# Altium PCB IM_v1.0.PcbDoc (part 4 of 4)
Units mm, origin at the board's own origin, x right, y up, seen from the top; angles counter-clockwise.
Board outline 120 x 85 mm, 6 copper layers (Top Layer, S1, S2, S3, S4, Bottom Layer), stack 1.546 mm thick; 285 components, 245 nets, 1048 pads, 483 vias.
Unrouted connection lines stored in the file: 53.
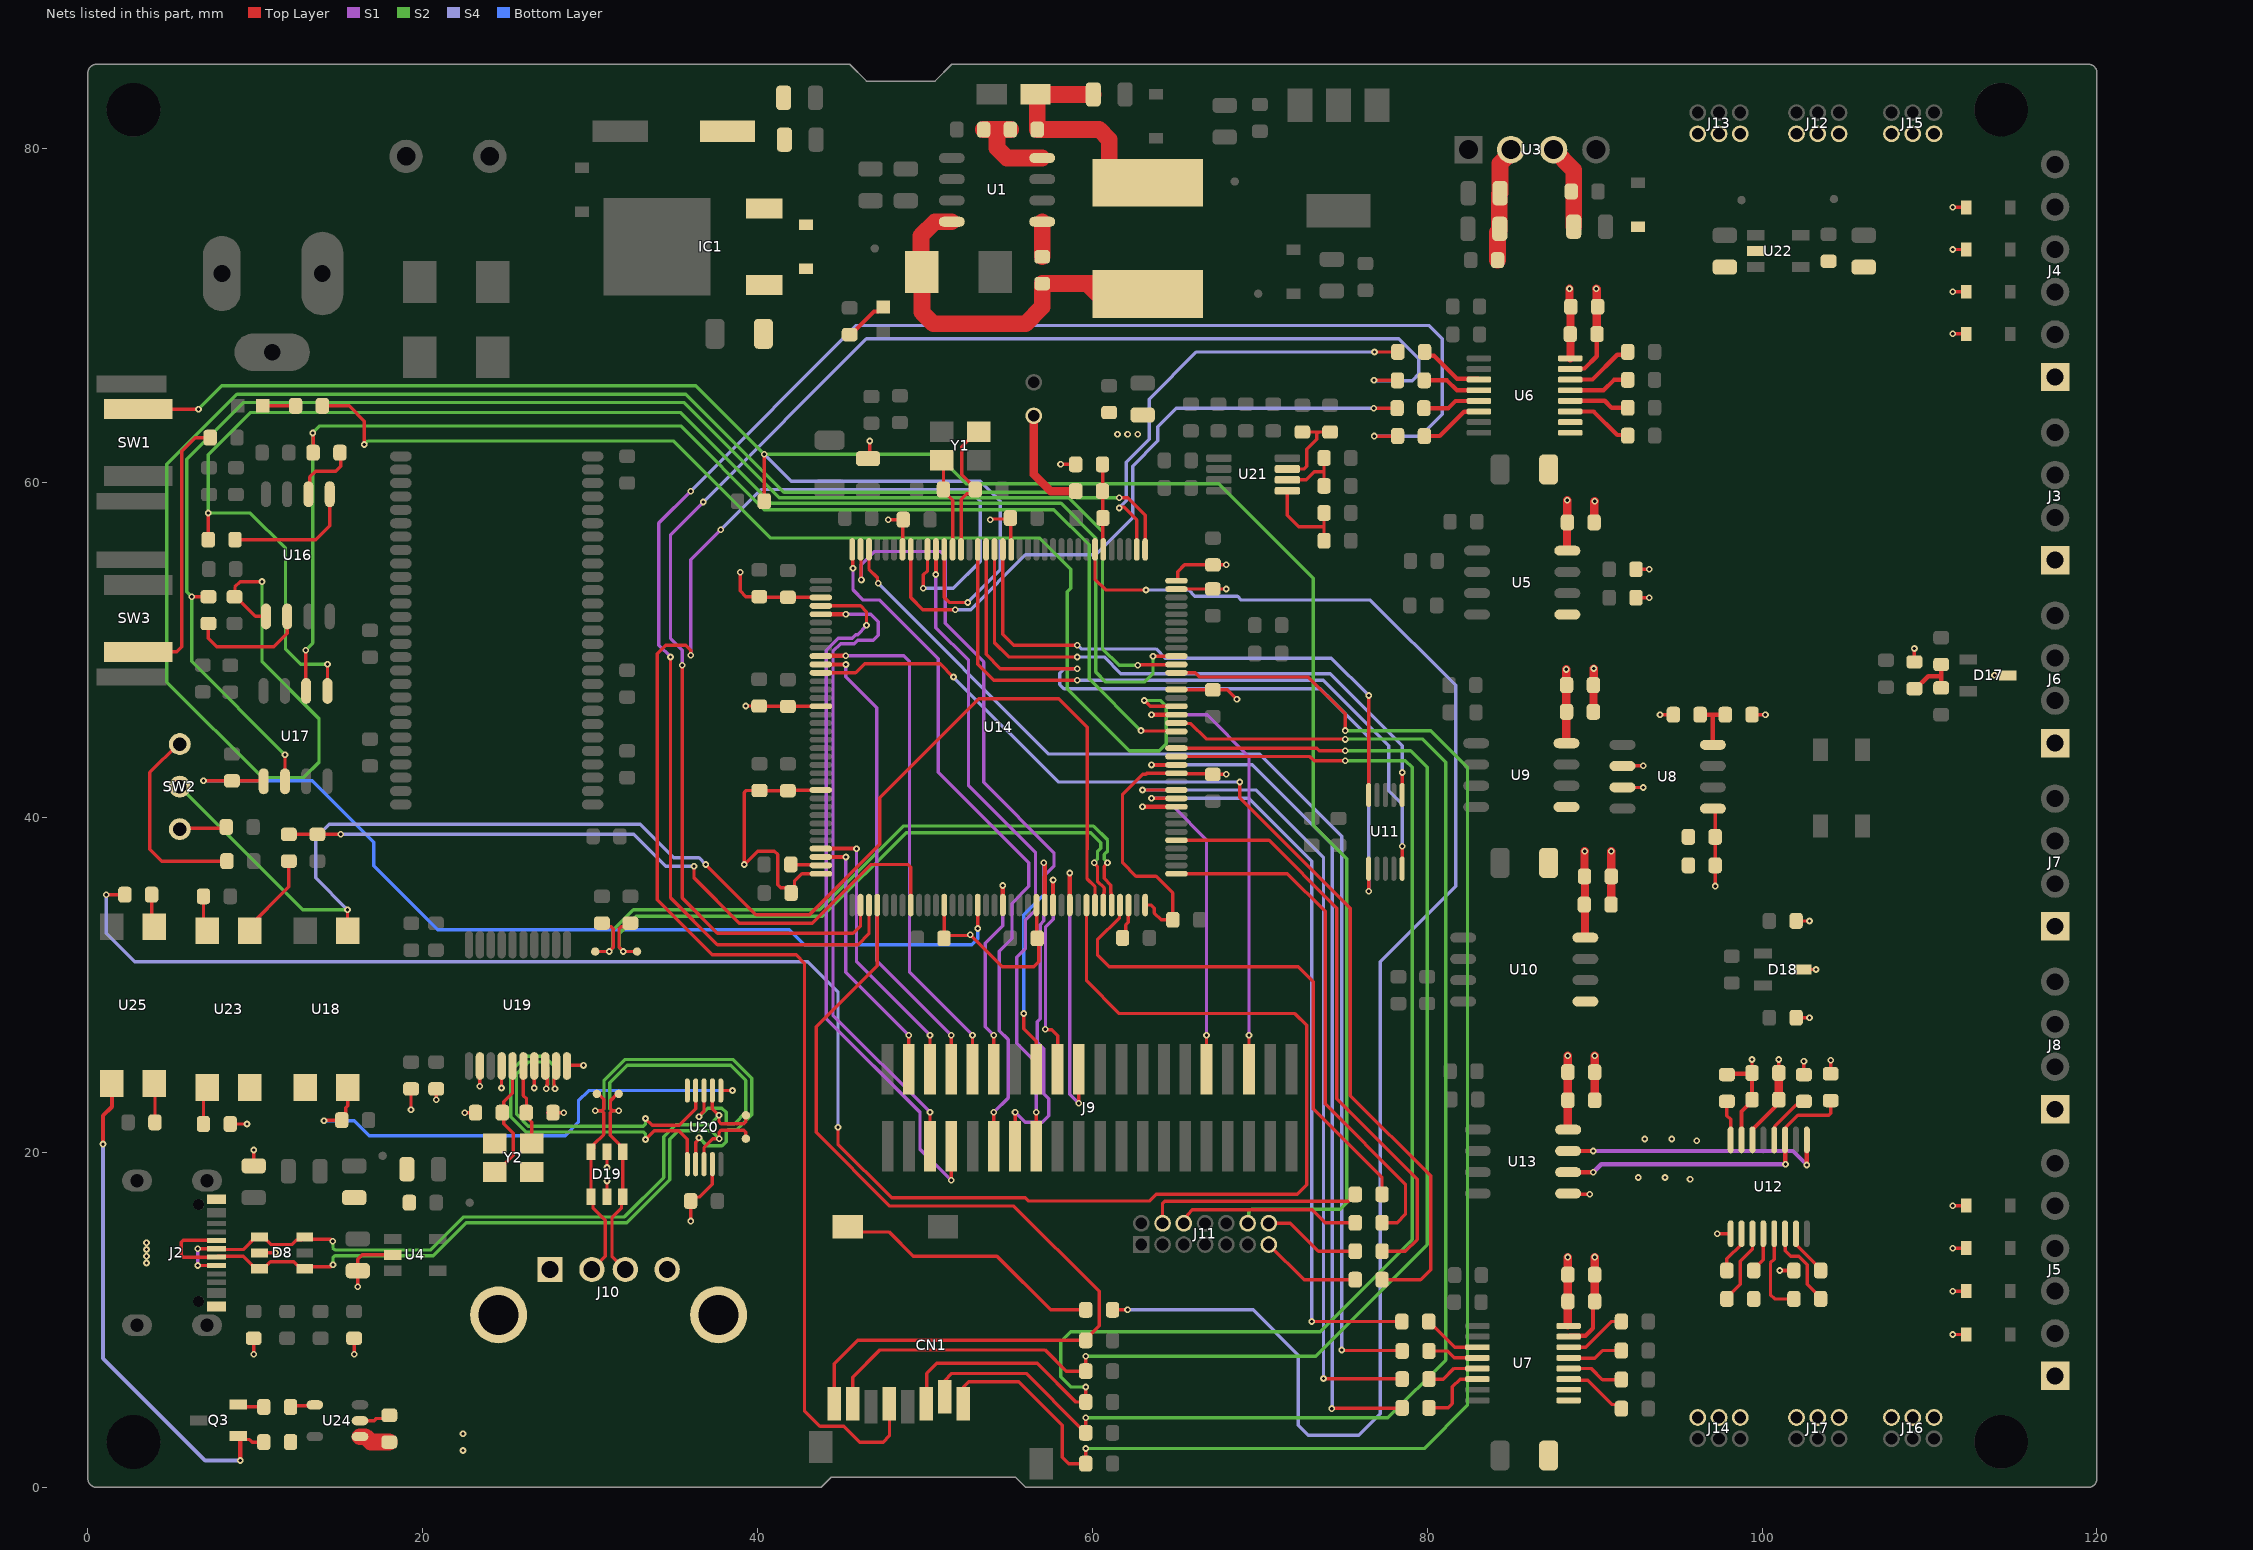
[diagram p7: the nets of this part, all layers, seen from the top]

## Via types
v1: diameter 0.4, hole 0.2, Top Layer to Bottom Layer, tented both sides, 474 vias
v2: diameter 0.4, hole 0.2, Top Layer to Bottom Layer, 8 vias
v3: diameter 0.45, hole 0.3, Top Layer to Bottom Layer, tented both sides, 1 vias

## Nets (pads, with @x,y where several pads share a name; then routed paths per layer and width w, separated by ;. In a path a pad name is that pad's centre, name@x,y a point inside that pad or via, vN(x,y) a via of type N, cw(c..) or ccw(c..) an arc to the next point about the centre after c; other vN are vias at no path point) (continued)
LTDC_G3: J9.21 U14.99 | length 17.9
  Top Layer w0.2: v1(59.19,22.932) J9.21@59.19,24.965
  Top Layer w0.254: v1(58.641,36.696) 58.645,36.691 58.645,34.785 U14.99@58.65,34.78
  S1 w0.2: v1(58.641,36.696) 58.641,23.481 v1(59.19,22.932)
LTDC_G4: J9.35 U14.69 | length 17.1
  Top Layer w0.2: J9.35@50.3,24.965 v1(50.3,26.998)
  Top Layer w0.254: U14.69@43.78,38.15 v1(45.91,38.15)
  S1 w0.2: v1(45.91,38.15) 45.91,31.389 v1(50.3,26.998)
LTDC_G5: J9.37 U14.70 | length 15.7
  Top Layer w0.2: J9.37@49.03,24.965 v1(49.03,26.998)
  Top Layer w0.254: U14.70@43.78,37.65 v1(45.275,37.65)
  S1 w0.2: v1(45.275,37.65) 45.275,30.753 v1(49.03,26.998)
LTDC_G6: J9.23 U14.97 | length 13.5
  Top Layer w0.2: v1(57.187,27.365) 57.225,27.326 57.574,27.326 57.92,26.98 J9.23@57.92,24.965
  Top Layer w0.254: U14.97@57.65,34.78 v1@57.65,36.275
  S1 w0.2: v1(57.187,27.365) 57.2,27.377 57.2,33.475 57.65,33.925 v1(57.65,36.275)
LTDC_G7: J9.9 U14.117 | length 20.4
  Top Layer w0.2: J9.9@66.81,24.965 v1(66.81,26.998)
  Top Layer w0.254: v1@62.987,40.65 U14.117@65.02,40.65
  S1 w0.2: v1(62.987,40.647) 64.853,40.647 66.81,38.69 v1(66.81,26.998)
LTDC_HSYNC: J9.25 U14.96 | length 15.7
  Top Layer w0.2: v1(55.9,28.3) 55.9,27.396 56.523,26.773 56.527,26.773 56.65,26.65 J9.25@56.65,24.965
  Top Layer w0.254: v1(57.1,37.3) 57.1,37.26 57.15,37.21 U14.96@57.15,34.78
  Bottom Layer w0.2: v1(55.9,28.3) 55.9,34.2 57.1,35.4 v1(57.1,37.3)
LTDC_R0: J9.5 U14.128 | length 27
  Top Layer w0.2: J9.5@69.35,24.965 v1(69.35,26.998)
  Top Layer w0.254: v1(63.525,46.15) U14.128@65.02,46.15
  S1 w0.2: v1(63.525,46.15) 66.85,46.15 69.35,43.65 v1(69.35,26.998)
LTDC_R1: J9.30 U14.36 | length 41.9
  Top Layer w0.2: U14.36@45.65,56.02 45.675,55.995 45.675,54.925 v1(45.7,54.9) ; J9.30@54.11,20.365 v1(54.11,22.398)
  S1 w0.2: v1(45.7,54.9) 45.702,54.898 45.702,53.598 46.3,53 47.3,53 50.8,49.5 50.8,42.7 56.2,37.3 56.2,35.9 55.2,34.9 55.2,32.8 54.432,32.032 54.432,27.28 54.965,26.747 54.965,23.253 v1(54.11,22.398)
LTDC_R2: J9.28 U14.35 | length 49.5
  Top Layer w0.2: U14.35@46.15,56.02 46.175,55.995 46.175,54.225 v1(46.2,54.2) ; J9.28@55.38,20.365 v1(55.38,22.398)
  S1 w0.2: v1(46.2,54.2) 46.2,55.1 47,55.9 50.9,55.9 51.2,55.6 51.2,51.6 53.5,49.3 53.5,42.1 57.7,37.9 57.7,37.1 57.1,36.5 57.1,33.838 56.873,33.611 56.873,27.977 56.7,27.804 56.7,26.596 57.1,26.196 57.1,23.5 57.4,23.2 57.4,22.2 57,21.8 55.978,21.8 v1(55.38,22.398)
LTDC_R3: J9.31 U14.46 | length 31.4
  Top Layer w0.2: J9.31@52.84,24.965 v1(52.84,26.998)
  Top Layer w0.254: U14.46@43.78,49.65 43.793,49.663 45.255,49.663 v1(45.268,49.677)
  S1 w0.2: v1(45.268,49.677) 45.282,49.662 48.738,49.662 48.9,49.5 49.077,49.323 49.077,48.5 49.077,42 49.077,30.761 v1(52.84,26.998)
LTDC_R4: J9.36 U14.41 | length 39.5
  Top Layer w0.2: J9.36@50.3,20.365 v1(50.3,22.398)
  Top Layer w0.254: U14.41@43.78,52.15 v1(45.275,52.15)
  S1 w0.2: v1(45.275,52.15) 46.75,52.15 47.2,51.7 47.2,50.9 46.9,50.6 45.99,50.6 45.786,50.396 44.958,50.396 44.5,49.938 44.5,28.198 v1(50.3,22.398)
LTDC_R5: J9.26 U14.26 | length 39.1
  Top Layer w0.2: J9.26@56.65,20.365 v1(56.65,22.398)
  Top Layer w0.254: v1(50.65,54.525) U14.26@50.65,56.02
  S1 w0.2: v1(50.65,54.525) 50.65,51.35 52.6,49.4 52.6,41.9 56.6,37.9 56.6,34.5 55.978,33.878 55.978,32.178 55.473,31.673 55.473,26.527 56.65,25.35 v1(56.65,22.398)
LTDC_R6: J9.33 U14.47 | length 28.3
  Top Layer w0.2: J9.33@51.57,24.965 v1(51.57,26.998)
  Top Layer w0.254: U14.47@43.78,49.15 v1(45.275,49.15)
  S1 w0.2: v1(45.275,49.15) 45.275,48.425 47.127,46.573 47.127,42.8 47.127,36.8 47.127,31.441 v1(51.57,26.998)
LTDC_R7: J9.29 U14.91 | length 12.8
  Top Layer w0.2: J9.29@54.11,24.965 v1(54.11,26.998)
  Top Layer w0.254: U14.91@54.65,34.78 v1(54.65,35.946)
  S1 w0.2: v1(54.11,26.998) 53.6,27.508 53.6,32.5 54.65,33.55 v1(54.65,35.946)
LTDC_VSYNC: J9.34 U14.40 | length 43.5
  Top Layer w0.2: U14.40@43.78,52.65 46.15,52.65 46.5,52.3 v1(46.5,51.5) ; v1(51.57,18.332) J9.34@51.57,20.365
  S1 w0.2: v1(46.5,51.5) 46.5,51.449 45.978,50.927 45.854,50.927 45.65,50.723 44.823,50.723 44.101,50.001 44.101,27.999 49.7,22.4 49.7,20.202 v1(51.57,18.332)
NetBT1_1: BT1.1 R46.2 | length 6.4
  Top Layer w0.5: BT1.1@56.5,64 56.5,60.5 57.5,59.5 R46.2@59,59.5
NetC1_1: C1.1 D2.1 L1.1 U1.8 | length 22.6
  Top Layer w1: D2.1@49.764,72.651 49.764,74.764 50.595,75.595 U1.8@51.6,75.595 ; D2.1@49.815,72.6 49.815,70.185 50.5,69.5 56,69.5 57,70.5 C1.1@57,71.9 L1.1@62.675,71.9 ; 59.675,71.9 L1.1@60.3,71.275
NetC1_2: C1.2 U1.1 | length 2.1
  Top Layer w1: C1.2@57,73.5 U1.1@57,75.595
NetC4_2: C4.2 C5.2 D1.2 FB1.1 IC1.S
NetC6_1: C6.1 FB2.1 L1.2 R2.2 | length 11.7
  Top Layer w1: C6.1@56.61,83.2 FB2.1@60.05,83.2 ; C6.1@56.7,83.11 R2.2@56.7,81.1 60.414,81.1 61,80.514 L1.2@61,78.85
NetC14_2: C14.2 C15.2 R77.1 U3.2 | length 6.9
  Top Layer w1: R77.1@84.2,73.3 84.2,74.975 84.3,75.075 84.3,77.25 C14.2@84.35,77.3 84.35,79.074 85,79.724 U3.2@85,79.9
NetC39_2: C39.2 R33.2 R34.2 | length 3.3
  Top Layer w0.254: C39.2@109.1,47.7 109.175,47.7 109.925,48.45 110.7,48.45 ; R33.2@110.7,47.75 110.7,48.45 ; R34.2@110.7,49.15 110.7,48.45
NetC49_1: C49.1 U12.2 | length 2.6
  Top Layer w0.2: C49.1@97.9,12.95 97.9,13.65 98.775,14.525 U12.2@98.775,15.15
NetC49_2: C49.2 U12.4 | length 2.4
  Top Layer w0.2: C49.2@99.5,12.95 99.5,13.025 100.075,13.6 U12.4@100.075,15.15
NetC53_1: C53.1 U12.5 | length 5.2
  Top Layer w0.2: U12.5@100.725,15.15 100.725,13.625 100.5,13.4 100.5,11.5 100.75,11.25 C53.1@101.9,11.25
NetC53_2: C53.2 U12.6 | length 5.1
  Top Layer w0.2: U12.6@101.375,15.15 101.375,14.125 101.7,13.8 102.2,13.8 102.7,13.3 102.7,12.125 103.5,11.325 C53.2@103.5,11.25
NetC54_1: C54.1 U12.3 | length 4.5
  Top Layer w0.2: C54.1@97.9,11.25 97.9,11.325 98.7,12.125 98.7,13.5 99.425,14.225 U12.3@99.425,15.15
NetC55_1: C55.1 U12.7 | length 2.8
  Top Layer w0.2: U12.7@102.025,15.15 102.025,14.512 103.5,13.037 C55.1@103.5,12.95
NetC56_1: C56.1 U14.23 Y1.3 | length 8.3
  Top Layer w0.2: U14.23@52.15,56.02 52.171,56.041 52.171,59.031 52.479,59.339 52.738,59.339 C56.1@53,59.6 53,59.675 52.2,60.474 52.2,62.15 53.1,63.05 Y1.3@53.2,63.05
NetC57_1: C57.1 U14.24 Y1.1 | length 5.6
  Top Layer w0.2: Y1.1@51,61.35 51.1,61.25 C57.1@51.1,59.6 51.1,59.518 51.65,58.968 U14.24@51.65,56.02
NetC58_1: C58.1 U14.71 | length 1.8
  Top Layer w0.2: C58.1@41.984,37.204 42.011,37.177 43.753,37.177 U14.71@43.78,37.15
NetC59_1: C59.1 U14.106 | length 2.1
  Top Layer w0.2: C59.1@61.799,32.815 61.987,33.003 61.987,33.59 62.15,33.753 U14.106@62.15,34.78
NetC92_2: C92.2 U19.5 Y2.1 | length 7.4
  Top Layer w0.2: Y2.1@24.3,18.825 24.4,18.825 25.4,19.825 25.4,21.144 24.827,21.717 24.827,22.298 C92.2@24.75,22.375 24.833,22.458 24.833,23.033 25.362,23.562 U19.5@25.362,25.165
NetC93_2: C93.2 U19.6 Y2.3 | length 4.5
  Top Layer w0.2: U19.6@26.012,25.165 26,25.153 26,23.4 26.2,23.2 26.2,22.1 26.5,21.8 Y2.3@26.5,20.85
NetCN1_9: CN1.9 R76.2 | length 16.1
  Top Layer w0.2: CN1.9@45.384,15.252 47.848,15.252 49.3,13.8 54.3,13.8 57.5,10.6 R76.2@59.6,10.6
NetD1_1: D1.1 IC1.G R3.2
NetD5_1: D5.1 R1.1 | length 2.7
  Top Layer w0.254: R1.1@45.5,68.851 45.575,68.851 46.951,70.227 47.227,70.227 D5.1@47.5,70.5
NetD22_1: D22.1 R5.1 | length 1.9
  Top Layer w0.2: D22.1@10.45,64.6 R5.1@12.4,64.6
NetJ11_4: J11.4 R62.2 | length 12.9
  Top Layer w0.2: J11.4@64.19,15.77 64.19,16.978 64.307,17.095 75.283,17.095 75.313,17.125 75.346,17.125 75.7,17.479 R62.2@75.7,17.5
NetJ11_6: J11.6 R63.2 | length 11.1
  Top Layer w0.2: J11.6@65.46,15.77 65.46,15.986 65.681,16.207 65.681,16.281 65.971,16.571 73.129,16.571 73.9,15.8 R63.2@75.7,15.8
NetJ11_13: J11.13 R64.1 | length 6
  Top Layer w0.2: J11.13@70.54,14.5 72.64,12.4 R64.1@75.7,12.4
NetJ11_14: J11.14 R68.2 | length 5.9
  Top Layer w0.2: J11.14@70.54,15.77 71.83,15.77 73.5,14.1 R68.2@75.7,14.1
NetQ3_2: Q3.2 R91.1 | length 1.6
  Top Layer w0.2: Q3.2@8.985,4.95 9.135,4.8 R91.1@10.5,4.8
NetR2_1: R2.1 R4.2 U1.4 | length 5.7
  Top Layer w1: R4.2@53.5,81.1 R2.1@55.1,81.1 ; 54.3,81.1 54.3,79.991 54.886,79.405 U1.4@57,79.405
NetR16_1: R16.1 U6.3 | length 3.9
  Top Layer w0.254: R16.1@79.843,67.818 80.068,67.593 80.407,67.593 81.785,66.215 83.037,66.215 U6.3@83.088,66.165
NetR17_2: R17.2 U6.14 | length 4.1
  Top Layer w0.254: U6.14@88.536,66.165 89.865,66.165 91.354,67.654 91.814,67.654 R17.2@91.978,67.818
NetR18_1: R18.1 U6.4 | length 3.5
  Top Layer w0.254: R18.1@79.82,66.121 81.179,66.121 81.77,65.53 U6.4@83.088,65.53
NetR19_2: R19.2 U6.13 | length 3.7
  Top Layer w0.254: U6.13@88.536,65.53 90.53,65.53 91.152,66.152 R19.2@91.976,66.152
NetR20_1: R20.1 U6.5 | length 3.5
  Top Layer w0.254: R20.1@79.797,64.46 81.26,64.46 81.695,64.895 U6.5@83.088,64.895
NetR21_2: R21.2 U6.12 | length 3.6
  Top Layer w0.254: U6.12@88.536,64.895 88.542,64.9 90.6,64.9 91.015,64.485 R21.2@91.978,64.485
NetR22_1: R22.1 U6.6 | length 3.9
  Top Layer w0.254: R22.1@79.826,62.795 80.751,62.795 82.208,64.253 83.081,64.253 U6.6@83.088,64.26
NetR23_2: R23.2 U6.11 | length 4
  Top Layer w0.254: U6.11@88.536,64.26 89.94,64.26 91.346,62.854 91.943,62.854 R23.2@91.978,62.818
NetR24_1: R24.1 U7.3 | length 3.6
  Top Layer w0.2: R24.1@80.094,9.909 80.094,9.87 80.439,9.525 80.478,9.525 81.638,8.365 U7.3@83,8.365
NetR25_2: R25.2 U7.14 | length 3.8
  Top Layer w0.2: U7.14@88.448,8.365 89.465,8.365 91,9.9 R25.2@91.6,9.9
NetR26_1: R26.1 U7.4 | length 3.1
  Top Layer w0.2: R26.1@80.102,8.143 81.199,8.143 81.612,7.73 U7.4@83,7.73
NetR27_2: R27.2 U7.13 | length 3.4
  Top Layer w0.2: U7.13@88.448,7.73 88.478,7.7 90,7.7 90.467,8.167 R27.2@91.6,8.167
NetR28_1: R28.1 U7.5 | length 3.2
  Top Layer w0.2: R28.1@80.102,6.461 80.961,6.461 81.595,7.095 U7.5@83,7.095
NetR29_2: R29.2 U7.12 | length 3.4
  Top Layer w0.2: U7.12@88.448,7.095 89.805,7.095 90.467,6.433 R29.2@91.6,6.433
NetR30_1: R30.1 U7.6 | length 4.2
  Top Layer w0.2: R30.1@80.102,4.745 81.245,4.745 81.5,5 81.5,6 81.96,6.46 U7.6@83,6.46
NetR31_2: R31.2 U7.11 | length 3.9
  Top Layer w0.2: U7.11@88.448,6.46 88.508,6.4 89.6,6.4 91.059,4.941 91.359,4.941 R31.2@91.6,4.7
NetR35_2: R35.2 R36.1 U8.8 | length 3.3
  Top Layer w0.254: R36.1@96.3,46.15 97.05,46.15 ; U8.8@97.062,44.349 97.05,44.361 97.05,46.15 ; R35.2@97.8,46.15 97.05,46.15
NetR40_2: R40.2 U12.12 | length 3.2
  Top Layer w0.2: U12.12@100.725,20.75 100.754,20.779 100.754,21.554 102.012,22.812 102.262,22.812 R40.2@102.5,23.05
NetR41_2: R41.2 U12.16 | length 2.4
  Top Layer w0.2: R41.2@97.9,23.05 97.9,22.2 98.125,21.975 U12.16@98.125,20.75
NetR52_2: R52.2 U16.2 | length 7.2
  Top Layer w0.2: R52.2@7.195,51.596 7.195,50.705 7.7,50.2 11.1,50.2 11.902,51.002 U16.2@11.902,52.02
NetR53_1: R53.1 U16.6 | length 4
  Top Layer w0.2: U16.6@13.172,59.32 13.248,59.397 13.248,60.348 13.6,60.7 14.8,60.7 15.1,61 15.1,61.75 R53.1@15.05,61.8
NetR54_1: R54.1 U16.5 | length 7.9
  Top Layer w0.2: R54.1@8.785,56.602 13.602,56.602 14.442,57.442 U16.5@14.442,59.32
NetR56_2: R56.2 SW2.2 | length 2.8
  Top Layer w0.2: SW2.2@5.486,39.313 5.549,39.376 8.199,39.376 R56.2@8.262,39.439
NetR58_1: R58.1 SW2.3 | length 12
  Top Layer w0.2: SW2.3@5.486,44.393 5.393,44.393 3.7,42.7 3.7,38.1 4.4,37.4 R58.1@8.3,37.4
NetR59_2: R59.2 R65.2 U21.7 | length 5.2
  Top Layer w0.2: U21.7@71.645,60.825 72.625,60.825 72.8,61 72.8,62 73.4,62.6 73.4,62.918 73.517,63.035 ; R65.2@72.537,63.035 73.517,63.035 ; R59.2@74.197,63.035 73.517,63.035
NetR60_2: R60.2 R66.1 U21.6 | length 4
  Top Layer w0.2: U21.6@71.645,60.175 72.775,60.175 73.252,60.652 73.835,60.652 ; R60.2@73.835,59.822 73.835,60.652 ; R66.1@73.835,61.481 73.835,60.652
NetR61_2: R61.2 R67.1 U21.5 | length 5.6
  Top Layer w0.2: U21.5@71.645,59.525 71.645,58.055 72.33,57.37 73.835,57.37 ; R67.1@73.835,56.541 73.835,57.37 ; R61.2@73.835,58.2 73.835,57.37
NetR85_1: R85.1 SW3.2 | length 16.5
  Top Layer w0.2: SW3.2@3,49.9 5.3,49.9 5.6,50.2 5.6,61.9 6.4,62.7 R85.1@7.3,62.7
NetR86_2: R86.2 U23.1 | length 2.2
  Top Layer w0.2: R86.2@6.9,21.7 U23.1@6.9,23.853
NetR87_2: R87.2 U23.4 | length 2.1
  Top Layer w0.2: R87.2@6.9,35.3 6.9,33.273 U23.4@6.93,33.243
NetR88_1: R88.1 U23.3 | length 5.2
  Top Layer w0.2: U23.3@9.47,33.243 9.47,33.343 12,35.873 R88.1@12,37.4
NetR91_2: R91.2 U24.4 | length 1.5
  Top Layer w0.2: R91.2@12.1,4.8 12.162,4.862 13.488,4.862 U24.4@13.55,4.925
NetR92_2: R92.2 U25.4 | length 2.3
  Top Layer w0.2: U25.4@3.97,24.12 4,24.09 R92.2@4,21.8
NetR93_2: R93.2 U25.1 | length 2
  Top Layer w0.2: R93.2@3.8,35.4 3.8,33.65 U25.1@3.97,33.48
NRST: J11.12 R47.2 SW1.1 U14.25 | length 149.8
  Top Layer w0.2: SW1.1@3,64.4 v1(6.6,64.4) ; R47.2@40.4,58.9 v1@40.4,61.7 ; U14.25@51.15,56.02 51.15,53.15 51.446,52.854 v1(52.55,52.854)
  S2 w0.2: v1(6.6,64.4) 8,65.8 36.3,65.8 v1(40.4,61.7) 50.7,61.7 52.45,59.95 67.55,59.95 73.2,54.3 73.2,39.55 75.2,37.55 75.2,17 74.8,16.6 69.5,16.6 69.336,16.436 69.336,15.836 J11.12@69.27,15.77
  S4 w0.2: v1(40.4,61.7) 42,60.1 53.3,60.1 54.5,58.9 54.5,54.804 v1(52.55,52.854)
RS232_RX: U12.9 U13.7 | length 16.1
  Top Layer w0.254: U13.7@88.418,20.09 v1(89.913,20.09) ; v1(102.675,19.255) U12.9@102.675,20.75
  S1 w0.254: v1(89.913,20.09) 101.839,20.09 v1(102.675,19.255)
RS232_TX: R42.1 U12.11 U13.6 | length 19.2
  Top Layer w0.2: U12.11@101.375,20.75 101.375,21.416 101.45,21.491 101.45,21.522 102.146,22.217 103.983,22.217 104.1,22.334 R42.1@104.1,23.1
  Top Layer w0.254: U13.6@88.418,18.82 v1(89.913,18.82) ; U12.11@101.375,20.75 101.387,20.737 101.387,19.313 v1(101.4,19.3)
  S1 w0.254: v1(89.913,18.82) 90.393,19.3 v1(101.4,19.3)
SDMMC2_CK: CN1.5 U14.27 | length 97.2
  Top Layer w0.2: v1(36,49.7) 36,50 35.7,50.3 34.5,50.3 34,49.8 34,35.1 37.3,31.8 42.3,31.8 42.8,31.3 42.8,4.57 43.723,3.647 45.153,3.647 46.1,2.7 47.5,2.7 47.874,3.074 CN1.5@47.874,4.702 ; v1(49.9,53.7) 49.9,54.5 50.15,54.75 U14.27@50.15,56.02
  S1 w0.2: v1(36,49.7) 36,55.4 v1(37.8,57.2)
  S4 w0.2: v1(37.8,57.2) 40.2,59.6 52.6,59.6 53.3,58.9 53.3,55.3 51.7,53.7 v1(49.9,53.7)
SDMMC2_CMD: CN1.3 R71.2 U14.123 | length 83.6
  Top Layer w0.2: CN1.3@50.074,4.702 50.1,4.728 50.1,6.8 50.7,7.4 56.7,7.4 59.006,5.094 R71.2@59.6,5.094 v1(59.6,5.994) ; U14.123@65.02,43.65 72.996,43.65 73.246,43.4 v1(75.1,43.4)
  S2 w0.2: v1(59.6,5.994) 58.706,5.994 58.1,6.6 58.1,8.7 58.7,9.3 73.6,9.3 79.1,14.8 79.1,43 78.7,43.4 v1(75.1,43.4)
SDMMC2_D0: CN1.7 R70.2 U14.124 | length 85
  Top Layer w0.2: CN1.7@45.674,4.702 45.674,6.574 47.3,8.2 57.171,8.2 58.437,6.934 R70.2@59.6,6.934 v1(59.6,7.834) ; U14.124@65.02,44.15 73.396,44.15 73.546,44 v1(75.1,44)
  S2 w0.2: v1(59.6,7.834) 73.334,7.834 80,14.5 80,43 79,44 v1(75.1,44)
SDMMC2_D1: CN1.8 R69.2 U14.76 | length 57.5
  Top Layer w0.2: CN1.8@44.574,4.702 44.574,7.374 45.974,8.774 R69.2@59.6,8.774 59.6,8.849 60.4,9.649 60.4,11.7 55.3,16.8 47.9,16.8 43.5,21.2 43.5,27.5 47.15,31.15 U14.76@47.15,34.78
SDMMC2_D2: CN1.1 R73.2 U14.133 | length 95
  Top Layer w0.2: CN1.1@52.274,4.702 52.3,4.728 52.3,6 52.6,6.3 55.6,6.3 58.2,3.7 58.2,1.8 58.586,1.414 R73.2@59.6,1.414 v1(59.6,2.314) ; U14.133@65.02,48.65 66.15,48.65 66.4,48.4 72.9,48.4 75.1,46.2 v1(75.1,45.2)
  S2 w0.2: v1(59.6,2.314) 79.814,2.314 82.4,4.9 82.4,43 80.2,45.2 v1(75.1,45.2)
SDMMC2_D3: CN1.2 R72.2 U14.127 | length 88
  Top Layer w0.2: CN1.2@51.174,5.102 51.174,6.374 51.6,6.8 56.054,6.8 59.287,3.567 59.308,3.567 59.6,3.275 R72.2@59.6,3.254 v1(59.6,4.154) ; U14.127@65.02,45.65 65.049,45.621 65.879,45.621 66.8,44.7 75.073,44.7 v1(75.1,44.673)
  S2 w0.2: v1(59.6,4.154) 77.654,4.154 81.1,7.6 81.1,43.3 79.7,44.7 75.127,44.7 v1(75.1,44.673)
SDMMC_Det: R76.1 U14.7 | length 93.4
  Top Layer w0.2: U14.7@60.15,56.02 60.15,54.25 60.798,53.602 v1(63.198,53.602) ; R76.1@61.2,10.6 v1(62.1,10.6)
  S4 w0.2: v1(62.1,10.6) 69.6,10.6 72.3,7.9 72.3,3.7 72.9,3.1 75.9,3.1 77.2,4.4 77.2,31.4 81.7,35.9 81.7,47.9 76.6,53 68.9,53 68.666,53.234 66.116,53.234 65.75,53.6 v1@63.2,53.6
SGN_GND: C7.1 C12.1 C13.1 C16.1 C22.1 C25.1 C27.1 C28.1 C30.1 C32.1 C33.2 C35.1 C38.1 C39.1 C40.1 C42.1 C46.1 C47.1 C50.1 C52.1 C54.2 C55.2 C100.1 D7.1 D9.1 D10.1 D11.1 D12.1 D13.1 D14.1 D15.1 D16.1 D17.3 D18.3 J3.1 J4.1 J5.1 J6.1 J7.1 J8.1 R36.2 R37.1 R42.2 R82.1 R83.1 R84.1 U3.3 U5.5 U6.9 U6.10 U6.15 U7.9 U7.10 U7.15 U8.2 U9.5 U10.5 U12.1 U12.14 U13.5 U22.2 | length 46.6
  Top Layer w0.2: U13.5@88.9,17.5 v1(89.7,17.5) ; U8.2@92.1,43.1 v1(92.9,43.1) ; v1(93.9,46.15) R36.2@94.7,46.15 ; v1(97.325,15.15) U12.1@98.125,15.15 ; C46.1@101,24.75 v1(101,25.55) ; R37.1@102.032,28.047 v1(102.832,28.047) ; D18.3@102.423,30.925 v1(103.223,30.925) ; R42.2@104.1,24.7 v1(104.1,25.5) ; C39.1@109.1,49.3 v1(109.1,50.1) ; v1(111.388,9.123) D13.1@112.187,9.123 ; v1(111.388,11.715) D14.1@112.188,11.715 ; v1(111.388,14.287) D15.1@112.188,14.287 ; v1(111.388,16.825) D16.1@112.188,16.825 ; v1(111.388,68.9) D9.1@112.187,68.9 ; v1(111.388,71.413) D10.1@112.188,71.413 ; v1(111.388,73.939) D11.1@112.188,73.939 ; v1(111.388,76.453) D12.1@112.188,76.453 ; v1(113.885,48.5) D17.3@114.685,48.5
  Top Layer w0.254: U7.15@88.448,9 88.499,9.051 89.451,9.051 89.9,9.5 89.9,11 C28.1@90,11.1 ; U6.15@88.536,66.8 88.569,66.832 89.391,66.832 90.12,67.562 C25.1@90.12,68.901 ; U12.14@99.425,20.75 99.425,21.375 100.772,22.722 100.772,22.922 C47.1@101,23.15 ; v1(101.05,12.95) C55.2@101.9,12.95
  Top Layer w0.5: C35.1@89.921,46.32 89.929,46.328 89.929,48.137 89.937,48.145 v1@89.937,48.911 ; C22.1@89.969,57.634 89.977,57.642 89.977,58.877 v1(90,58.9) ; C28.1@90,11.1 C30.1@90,12.7 v1(90,13.75) ; C50.1@90,23.121 v1(90,25.771) ; v1(90.1,71.6) 90.12,71.58 C25.1@90.12,68.901 ; C40.1@90.979,34.808 90.987,34.816 90.987,36.487 C42.1@90.995,36.495 90.995,37.995 v1(91,38) ; C47.1@101,23.15 C46.1@101,24.75 ; v1@89.937,48.911 v1(89.938,48.912)
  Top Layer w1: U3.3@87.54,79.9 88.75,78.69 C12.1@88.75,75.3
  other v1: 95.7,18.4 92.6,18.5 94.2,18.5 96.1,20.7 93,20.8 94.6,20.8
SPI1_MISO: R52.1 U14.134 U17.2 | length 93.9
  Top Layer w0.2: v1(6.2,53.2) 6.202,53.198 7.193,53.198 R52.1@7.195,53.196 ; U17.2@11.765,42.17 v1(11.765,43.765) ; v1(62.7,49.1) 62.725,49.125 65.095,49.125 U14.134@65.117,49.147
  S2 w0.2: v1(11.765,43.765) 6.2,49.33 v1(6.2,53.2) 5.9,53.5 5.9,61.4 9.3,64.8 35.6,64.8 41.3,59.1 58.6,59.1 60.6,57.1 60.6,50.1 61.6,49.1 v1(62.7,49.1)
SPI1_MOSI: R54.2 U14.135 U17.5 | length 92.6
  Top Layer w0.2: R54.2@7.185,56.602 v1(7.185,58.197) ; U17.5@14.305,47.57 v1(14.305,49.165) ; v1(63.622,49.647) U14.135@65.117,49.647
  S2 w0.2: v1(14.305,49.165) 12.7,49.165 11.8,50.065 11.8,56.1 9.703,58.197 v1(7.185,58.197) 7.185,61.685 9.7,64.2 35.4,64.2 40.827,58.773 58.127,58.773 60.2,56.7 60.2,48.7 60.8,48.1 63.1,48.1 63.622,48.622 v1(63.622,49.647)
SPI1_NOR_CS: R51.2 U14.1 U16.1 | length 107.1
  Top Layer w0.2: v1(10.4,54.1) 9.1,54.1 8.779,53.779 8.779,53.221 R51.2@8.755,53.196 8.83,53.196 10.006,52.02 U16.1@10.632,52.02 ; v1(61.6,59.1) 62.1,59.1 63.147,58.053 U14.1@63.147,55.923
  S2 w0.2: v1(10.4,54.1) 10.4,49.3 13.8,45.9 13.8,43.3 12.9,42.4 10.4,42.4 4.7,48.1 4.7,61.1 8.9,65.3 35.7,65.3 41.573,59.427 58.735,59.427 59.062,59.1 v1(61.6,59.1)
SPI1_PSRAM_CS: R55.2 U14.88 U17.1 | length 57
  Top Layer w0.2: v1(6.905,42.2) 10.465,42.2 U17.1@10.495,42.17 ; v1(53.153,33.382) U14.88@53.153,34.877
  Bottom Layer w0.2: v1(6.905,42.2) 13.4,42.2 17.073,38.527 17.073,37.127 20.887,33.313 41.887,33.313 42.8,32.4 52.8,32.4 53.153,32.753 v1(53.153,33.382)
SPI1_SCK: R53.2 U14.126 U17.6 | length 80.9
  Top Layer w0.2: v1(13,50) 13.017,49.983 13.017,47.588 U17.6@13.035,47.57 ; v1(13.431,62.978) 13.45,62.959 R53.2@13.45,61.8 ; v1(62.9,45.2) 62.925,45.175 65.089,45.175 U14.126@65.117,45.147
  S2 w0.2: v1(13,50) 13.431,50.431 v1(13.431,62.978) 13.848,63.395 35.405,63.395 40.4,58.4 57.7,58.4 59.8,56.3 59.8,48.3 v1(62.9,45.2)
SPI2_CS: R16.2 U14.2 | length 26.6
  Top Layer w0.2: v1(61.6,58.5) 61.745,58.56 61.867,58.56 62.647,57.78 U14.2@62.647,55.923 ; v1(76.845,67.815) R16.2@78.34,67.815
  S4 w0.2: v1(61.6,58.5) 61.604,58.5 62.027,58.923 62.027,61.227 63.4,62.6 63.4,65 66.215,67.815 v1(76.845,67.815)
SPI2_MISO: R22.2 U14.75 | length 100.3
  Top Layer w0.2: v1(34.8,49.6) 34.8,35.2 37.6,32.4 46,32.4 46.65,33.05 U14.75@46.65,34.78 ; v1(76.828,62.792) R22.2@78.323,62.792
  S1 w0.2: v1(34.8,49.6) 34.1,50.3 34.1,57.6 v1(36,59.5)
  S4 w0.2: v1(36,59.5) 45.9,69.4 80.1,69.4 80.9,68.6 80.9,64.1 79.592,62.792 v1(76.828,62.792)
SPI2_MOSI: R20.2 U14.29 | length 39.6
  Top Layer w0.2: U14.29@49.15,56.02 49.15,53.15 49.873,52.427 v1(51.81,52.427) ; v1(76.799,64.457) R20.2@78.294,64.457
  S4 w0.2: v1(51.81,52.427) 52.727,52.427 56,55.7 60.2,55.7 62.4,57.9 62.4,61 63.9,62.5 63.9,63.357 65,64.457 v1(76.799,64.457)
SPI2_SCK: R18.2 U14.74 | length 90.2
  Top Layer w0.2: v1(35.5,49.1) 35.5,35.2 37.6,33.1 45.7,33.1 46.15,33.55 U14.74@46.15,34.78 ; v1(76.822,66.118) R18.2@78.317,66.118
  S1 w0.2: v1(35.5,49.1) 35.5,50 34.8,50.7 34.8,56.9 v1(36.75,58.85)
  S4 w0.2: v1(36.75,58.85) 46.5,68.6 78.3,68.6 79.5,67.4 79.5,66.5 79.1,66.1 76.84,66.1 v1(76.822,66.118)
STATUS_LED: R5.2 U14.129 | length 70.3
  Top Layer w0.2: R5.2@14,64.6 15.6,64.6 16.511,63.689 v1(16.511,62.286) ; v1(63.1,47) 63.45,46.65 U14.129@65.02,46.65
  S2 w0.2: v1(16.511,62.286) 16.725,62.5 34.971,62.5 40.771,56.7 56.85,56.7 58.7,54.85 58.7,53.7 58.5,53.5 58.5,47.7 62.2,44 64,44 64.4,44.4 64.4,46.65 64.05,47 v1(63.1,47)
SWCLK: R63.1 U14.109 | length 31.5
  Top Layer w0.2: U14.109@65.02,36.65 71.65,36.65 73.9,34.4 73.9,22.9 78.7,18.1 78.7,16.3 78.2,15.8 R63.1@77.3,15.8
SWDIO: R62.1 U14.105 | length 31.5
  Top Layer w0.2: U14.105@61.65,34.78 61.621,34.751 61.621,34.021 60.3,32.7 60.3,31.8 61,31.1 72.3,31.1 73.2,30.2 73.2,22.6 77.3,18.5 R62.1@77.3,17.5
U5_VCC: C22.2 J12.1 J12.2 J12.3 R13.2 R15.1 U5.8 | length 4.3
  Top Layer w0.2: R15.1@92.469,53.134 v1(93.269,53.134) ; R13.2@92.469,54.834 v1(93.269,54.834)
  Top Layer w0.5: 88.351,56.289 88.351,57.634 88.37,57.654 v1(88.37,58.962)
U6_VCC: C25.2 C27.2 J13.1 J13.2 J13.3 U6.16 | length 4.2
  Top Layer w0.5: v1(88.5,71.6) 88.5,70.596 C27.2@88.578,70.518 88.557,70.497 88.557,67.456 U6.16@88.536,67.435
U7_VCC: C28.2 C30.2 J14.1 J14.2 J14.3 U7.16 | length 4.1
  Top Layer w0.5: U7.16@88.4,9.683 C30.2@88.4,12.7 v1(88.4,13.75)
U9_VCC: C32.2 C33.1 C35.2 C38.2 J15.1 J15.2 J15.3 R35.1 U8.3 U8.5 U9.8 | length 11.1
  Top Layer w0.2: U8.3@91.662,41.8 v1(92.9,41.8) ; U8.5@97.062,40.539 97.2,40.401 C32.2@97.2,37.15 v1(97.2,35.912) ; R35.1@99.4,46.15 v1(100.2,46.15)
  Top Layer w0.5: U9.8@88.303,44.444 v1(88.303,48.855)
U10_VCC: C40.2 C42.2 J16.1 J16.2 J16.3 R39.2 U10.8 | length 6
  Top Layer w0.2: R39.2@102.032,33.829 v1(102.832,33.829)
  Top Layer w0.5: v1(89.4,38) 89.395,37.995 C42.2@89.395,36.495 89.42,36.47 89.42,32.855 U10.8@89.445,32.83
U13_VCC: C46.2 C47.2 C50.2 C52.2 J17.1 J17.2 J17.3 R40.1 R41.1 U12.15 U13.8 | length 11.5
  Top Layer w0.2: C46.2@99.4,24.75 v1(99.4,25.55) ; R40.1@102.5,24.65 v1(102.5,25.45)
  Top Layer w0.254: R41.1@97.9,24.65 97.95,24.7 99.35,24.7 C46.2@99.4,24.75 C47.2@99.4,23.15 99.4,23.075 98.775,22.45 U12.15@98.775,20.75
  Top Layer w0.5: 88.4,21.704 v1(88.4,25.771)
UART5_RX: R64.2 U14.48 | length 65.2
  Top Layer w0.2: U14.48@43.78,48.65 45.85,48.65 46.4,49.2 50.9,49.2 v1(51.7,48.4) ; v1(68.8,42.133) 68.8,41.2 75.4,34.6 75.4,23.4 80.2,18.6 80.2,13 79.6,12.4 R64.2@77.3,12.4
  S4 w0.2: v1(51.7,48.4) 57.967,42.133 v1(68.8,42.133)
UART5_TX: R68.1 U14.113 | length 35.4
  Top Layer w0.2: U14.113@65.02,38.65 70.55,38.65 74.6,34.6 74.6,23.2 79.4,18.4 79.4,14.8 78.7,14.1 R68.1@77.3,14.1
UART7_RX: U11.10 U14.18 | length 34.4
  Top Layer w0.2: U14.18@54.65,56.02 54.65,50.95 55.3,50.3 v1(59.1,50.3) ; U11.10@76.5,41.35 v1(76.5,47.3)
  S4 w0.2: v1(59.1,50.3) 59.326,50.074 63.799,50.074 64.346,49.527 74.273,49.527 v1(76.5,47.3)
UART7_RX_SEL: U11.1 U14.20 | length 44.2
  Top Layer w0.2: U14.20@53.65,56.02 53.65,49.75 54.5,48.9 v1(59.1,48.9) ; v1(76.5,35.6) U11.1@76.5,36.95
  S4 w0.2: v1(59.1,48.9) 58.32,48.9 58.05,48.63 58.05,47.95 58.3,47.7 73.6,47.7 76.5,44.8 v1(76.5,35.6)
UART7_TX: U11.6 U14.19 | length 35.4
  Top Layer w0.2: U14.19@54.15,56.02 54.15,50.45 55,49.6 v1(59.1,49.6) ; U11.6@78.5,41.35 v1(78.5,42.7)
  S4 w0.2: v1(59.1,49.6) 60.7,49.6 61.7,48.6 74.2,48.6 78.5,44.3 v1(78.5,42.7)
UART7_TX_SEL: U11.5 U14.21 | length 41.1
  Top Layer w0.2: U14.21@53.15,56.02 53.15,49.15 54.1,48.2 v1(59.1,48.2) ; U11.5@78.5,36.95 v1(78.5,38.3)
  S4 w0.2: v1(59.1,48.2) 73.8,48.2 77.7,44.3 77.7,41.6 78.5,40.8 v1(78.5,38.3)
USART2_CTS: R26.2 U14.34 | length 70.5
  Top Layer w0.2: U14.34@46.65,56.02 46.65,54.85 47.162,54.338 47.162,54.038 v1(47.2,54) ; v1(74.9,8.2) 74.928,8.172 78.474,8.172 R26.2@78.502,8.143
  S4 w0.2: v1(47.2,54) 57.4,43.8 70,43.8 74.9,38.9 v1(74.9,8.2)
USART2_RTS: R24.2 U14.118 | length 45.5
  Top Layer w0.2: v1(63.525,41.15) U14.118@65.02,41.15 ; v1(73.1,9.9) R24.2@78.485,9.9
  S4 w0.2: v1(63.525,41.15) 69.35,41.15 73.1,37.4 v1(73.1,9.9)
USART2_RX: R30.2 U14.122 | length 52.2
  Top Layer w0.2: v1(74.3,4.7) 74.322,4.722 78.48,4.722 R30.2@78.502,4.745
  Top Layer w0.23: v1(63.525,43.15) U14.122@65.02,43.15
  S4 w0.2: v1(63.525,43.15) 69.55,43.15 74.327,38.373 74.327,4.727 v1(74.3,4.7)
USART2_TX: R28.2 U14.119 | length 50.4
  Top Layer w0.2: v1(62.987,41.65) U14.119@65.02,41.65 ; v1(73.8,6.5) 73.819,6.481 78.483,6.481 R28.2@78.502,6.461
  S4 w0.2: v1(62.987,41.65) 69.796,41.65 73.8,37.646 v1(73.8,6.5)
USB_D1_N: D8.3 D8.4 J2.A7 J2.B7 TP8.1 U20.8 | length 45.7
  Top Layer w0.2: J2.B7@7.686,14.75 5.693,14.75 5.576,14.633 5.576,13.867 5.693,13.75 J2.A7@7.686,13.75 7.736,13.8 9.275,13.8 10.025,13.05 D8.3@10.25,13.05 10.475,13.05 10.9,13.475 12.3,13.475 12.725,13.05 D8.4@12.95,13.05 13.076,13.176 14.515,13.176 v1(14.64,13.301) ; U20.8@36.8,19.3 36.8,20.3 37.323,20.823 v2(37.701,20.823) 37.695,20.828 37.695,21.204 37.813,21.321 39.183,21.321 39.3,21.204 TP8.1@39.3,20.823
  S2 w0.2: v1(14.64,13.301) 14.635,13.307 14.635,13.708 14.752,13.826 20.619,13.826 22.594,15.8 32.194,15.8 34.749,18.355 34.749,20.799 35.25,21.3 37.223,21.3 v2(37.701,20.823)
USB_D1_P: D8.1 D8.6 J2.A6 J2.B6 TP7.1 U20.2 | length 43.4
  Top Layer w0.2: v1(6.55,13.25) J2.B6@7.686,13.25 ; v1(6.55,14.25) J2.A6@7.686,14.25 7.736,14.2 9.275,14.2 10.025,14.95 D8.1@10.25,14.95 10.475,14.95 10.922,14.503 12.203,14.503 12.475,14.775 12.775,14.775 D8.6@12.95,14.95 13.076,14.824 14.504,14.824 v1(14.63,14.698) ; U20.2@37.3,23.7 37.3,22.61 v2(37.69,22.22) 37.695,22.214 37.695,21.838 37.813,21.721 39.183,21.721 39.3,21.838 TP7.1@39.3,22.22
  S1 w0.2: v1(6.55,13.25) v1(6.55,14.25)
  S2 w0.2: v1(14.63,14.698) 14.635,14.693 14.635,14.292 14.752,14.174 20.475,14.174 22.449,16.149 32.049,16.149 34.4,18.5 34.4,20.944 35.105,21.649 37.151,21.649 37.69,22.188 v2(37.69,22.22)
USB_D2_N: D19.1 D19.6 J10.02 TP9.1 U20.7 | length 32.6
  Top Layer w0.2: J10.02@30.1,13.01 30.9,13.81 30.9,15.944 30.172,16.672 30.172,17.228 D19.1@30.05,17.35 D19.6@30.05,20.05 30.225,20.225 30.225,20.497 30.8,21.072 30.8,21.343 30.8,22.383 30.683,22.5 ; v2(30.302,22.5) 30.683,22.5 ; TP9.1@30.4,23.5 30.481,23.5 30.813,23.168 30.813,22.617 30.696,22.5 30.683,22.5 ; U20.7@36.3,19.3 36.3,20.619 36.5,20.819 v2(36.5,20.873)
  S2 w0.2: v2(30.302,22.5) 30.708,22.5 30.826,22.617 30.826,24.319 32.055,25.549 38.545,25.549 39.649,24.445 39.649,22.255 38.742,21.348 38.245,21.348 38.128,21.231 38.128,20.646 37.877,20.396 36.977,20.396 v2(36.5,20.873)
USB_D2_P: D19.3 D19.4 J10.03 TP10.1 U20.3 | length 30.8
  Top Layer w0.2: v2(31.699,22.5) 31.317,22.5 ; TP10.1@31.7,23.5 31.619,23.5 31.213,23.094 31.213,22.604 31.317,22.5 ; J10.03@32.1,13.01 31.3,13.81 31.3,16.1 31.867,16.667 31.867,17.267 D19.3@31.95,17.35 D19.4@31.95,20.05 31.95,20.275 31.2,21.025 31.2,22.383 31.317,22.5 ; v2(36.5,22.127) 36.5,22.181 36.8,22.481 U20.3@36.8,23.7
  S2 w0.2: v2(31.699,22.5) 31.292,22.5 31.175,22.617 31.175,24.175 32.2,25.2 38.4,25.2 39.3,24.3 39.3,22.4 38.597,21.697 38.234,21.697 38.117,21.814 38.117,22.396 37.867,22.647 37.02,22.647 v2(36.5,22.127)
USB_D_N: U19.9 U20.6 | length 22
  Top Layer w0.2: v1(27.9,23.8) 27.862,23.838 27.862,23.98 27.837,24.005 27.837,24.383 27.962,24.509 U19.9@27.962,25.165 ; v2(33.3,20.773) 33.827,21.3 35.3,21.3 35.8,20.8 U20.6@35.8,19.3
  S2 w0.2: v1(27.9,23.8) 27.862,23.838 27.862,24.018 27.811,24.069 27.811,25.183 27.245,25.749 26.155,25.749 25.251,24.845 25.251,22.13 26.155,21.226 33.183,21.226 33.3,21.108 v2(33.3,20.773)
USB_D_P: U19.8 U20.4 | length 20.5
  Top Layer w0.2: U19.8@27.312,25.165 27.312,24.509 27.437,24.384 27.437,24.005 27.411,23.98 27.411,23.838 v1(27.373,23.8) ; v2(33.3,22.027) 33.7,21.627 35.327,21.627 36.3,22.6 U20.4@36.3,23.7
  S2 w0.2: v1(27.373,23.8) 27.411,23.838 27.411,24.018 27.462,24.069 27.462,25.038 27.1,25.4 26.3,25.4 25.6,24.7 25.6,22.275 26.3,21.574 33.183,21.574 33.3,21.692 v2(33.3,22.027)
USB_FS_ID: SW2.1 U14.102 U18.1 | length 86.6
  Top Layer w0.2: v1(15.5,34.5) 15.5,33.257 U18.1@15.514,33.243 ; v1(36.9,37.2) 39.9,34.2 43.1,34.2 47.3,38.4 47.3,41.2 53.2,47.1 58,47.1 59.7,45.4 59.7,38.1 59.673,38.073 59.673,36.365 60.15,35.888 U14.102@60.15,34.78
  S2 w0.2: SW2.1@5.486,41.853 12.839,34.5 v1(15.5,34.5)
  S4 w0.2: v1(15.5,34.5) 13.6,36.4 13.6,38.8 14.4,39.6 33,39.6 35,37.6 36.5,37.6 v1(36.9,37.2)
USB_FS_N: R94.1 TP11.1 U14.103 | length 39.9
  Top Layer w0.2: R94.1@32.4,33.7 32.176,33.476 31.842,33.476 31.724,33.359 31.724,32.245 v1(31.969,32) TP11.1@32.8,32 ; v1(60.1,37.3) 60.1,37.283 60.3,37.083 60.3,36.2 60.7,35.8 60.7,35.502 60.679,35.48 60.679,34.809 U14.103@60.65,34.78
  S2 w0.2: v1(31.969,32) 31.75,32.219 31.75,33.1 32.75,34.1 43.866,34.1 48.866,39.1 59.9,39.1 60.5,38.5 60.5,38.166 60.3,37.966 60.3,37.517 60.1,37.317 v1(60.1,37.3)
USB_FS_P: R95.1 TP12.1 U14.104 | length 41.3
  Top Layer w0.2: TP12.1@30.3,32 v1(31.131,32) 31.375,32.245 31.375,33.359 31.258,33.476 30.924,33.476 R95.1@30.7,33.7 ; v1(60.9,37.3) 60.9,37.283 60.7,37.083 60.7,36.366 61.1,35.966 61.1,35.502 61.121,35.48 61.121,34.809 U14.104@61.15,34.78
  S2 w0.2: v1(31.131,32) 31.35,32.219 31.35,33.266 32.584,34.5 43.7,34.5 48.7,39.5 60.066,39.5 60.9,38.666 60.9,38 60.7,37.8 60.7,37.517 60.9,37.317 v1(60.9,37.3)
USB_FS_VBUS: R93.1 U14.101 | length 115.8
  Top Layer w0.2: v1(1.1,35.4) R93.1@2.2,35.4 ; v1(44.8,21.5) 44.8,20.5 48,17.3 56,17.3 56.2,17.1 63.4,17.1 63.808,17.508 72.242,17.508 72.8,18.066 72.8,27.6 72.1,28.3 61.6,28.3 59.65,30.25 U14.101@59.65,34.78
  S4 w0.2: v1(1.1,35.4) 1.1,33.1 2.8,31.4 43,31.4 44.8,29.6 v1(44.8,21.5)
USB_FS_VBUS_DET: R88.2 R89.1 U14.80 | length 43.5
  Top Layer w0.2: R88.2@12,39 R89.1@13.7,39 v1(15.1,39) ; v1(36.2,37.1) 36.2,36.4 38.9,33.7 43.262,33.7 46.762,37.2 49,37.2 49.15,37.05 U14.80@49.15,34.78
  S4 w0.2: v1(15.1,39) 32.6,39 34.5,37.1 v1(36.2,37.1)
USB_GND: C17.1 C18.1 C19.1 C20.1 C21.1 C89.2 C91.2 C92.1 C93.1 C95.1 C96.1 D8.2 D19.2 J2.A1-B12 J2.B1-A12 J10.04 J10.S1 J10.S2 R8.1 R9.1 R90.1 U4.2 U18.3 U19.2 U19.4 U19.7 U19.10 U20.5 U20.9 U23.2 U24.2 Y2.2 Y2.4 | length 22.2
  Top Layer w0.2: v1(9.9,7.95) R9.1@9.9,8.9 ; C17.1@9.9,19.2 v1(9.9,20.15) ; D8.2@10.25,14 v1(11.2,14) ; v1(15.9,7.95) R8.1@15.9,8.9 ; v1(16.117,11.984) C19.1@16.117,12.934 16.117,13.617 16.384,13.884 U4.2@18.196,13.884 ; U24.2@16.25,3.975 17.091,3.975 17.225,4.109 17.809,4.109 C89.2@18,4.3 ; v1(19.3,22.55) C95.1@19.3,23.5 ; v1(20.8,23.15) C96.1@20.8,24.1 ; v1(22.501,22.375) C92.1@23.451,22.375 ; v1(23.4,23.95) U19.2@23.4,24.9 ; v1(24.7,23.85) U19.4@24.7,24.8 ; v1(26.65,23.85) U19.7@26.65,24.8 ; C93.1@27.475,22.375 v1(28.425,22.375) ; U19.10@28.612,25.165 28.647,25.2 v1(29.6,25.2) ; D19.2@31,17.35 v1(31,18.3) ; v1(36,15.9) C91.2@36,17.1 36.241,17.341 36.541,17.341 37.3,18.1 U20.9@37.3,19.3
  other v1: 3.5,13.4 3.5,13.8 3.5,14.2 3.5,14.6
USB_SEL: R57.2 U18.4 U20.1 | length 30.5
  Top Layer w0.2: v1(14.1,21.9) 14.115,21.915 15.145,21.915 R57.2@15.16,21.93 15.398,22.168 15.398,22.667 15.514,22.783 U18.4@15.514,23.883 ; U20.1@37.8,23.7 v1(38.5,23.7)
  Bottom Layer w0.2: v1(14.1,21.9) 15.9,21.9 16.8,21 28.5,21 29.3,21.8 29.3,23.1 29.9,23.7 v1(38.5,23.7)
USB_VBUS_EN: Q3.1 R90.2 U25.3 | length 30.2
  Top Layer w0.2: Q3.1@9.185,2.85 9.65,2.85 9.8,2.7 R90.2@10.5,2.7
  Top Layer w0.254: v1(0.9,20.5) 0.9,22.2 1.43,22.73 U25.3@1.43,24.12 ; Q3.1@8.985,3.05 9.1,2.935 v1(9.1,1.6)
  S4 w0.254: v1(0.9,20.5) 0.9,7.7 7,1.6 v1(9.1,1.6)
Vbat: C60.1 R45.2 R46.1 U14.6 | length 5.1
  Top Layer w0.2: R45.2@60.6,61.1 60.625,61.075 60.625,56.045 U14.6@60.65,56.02
VBUS: C89.1 D19.5 J10.01 R86.1 U24.1 | length 3.8
  Top Layer w0.2: R86.1@8.5,21.7 v1(9.5,21.7) ; v1(31,19.1) D19.5@31,20.05
  Top Layer w1: U24.1@16.25,3.025 16.57,3.025 16.895,2.7 C89.1@18,2.7
  other v1: 22.4,2.2 22.4,3.2
VDD: C62.2 C63.1 C64.1 C65.1 C66.1 C67.1 C68.1 C69.1 C70.1 C71.1 C72.1 C73.1 C74.1 C75.1 C76.1 C77.1 C78.1 FB3.2 FB4.1 R45.1 U14.17 U14.30 U14.39 U14.52 U14.62 U14.72 U14.84 U14.95 U14.108 U14.121 U14.131 U14.143 U14.144 | length 76.1
  Top Layer w0.2: v1(38.961,54.665) 38.961,53.538 39.3,53.2 C76.1@40.1,53.2 40.125,53.175 43.755,53.175 U14.39@43.78,53.15 ; v1(39.294,46.667) C77.1@40.094,46.667 40.107,46.654 41.792,46.654 C66.1@41.805,46.64 41.81,46.645 43.775,46.645 U14.52@43.78,46.65 ; U14.72@43.78,36.65 42.65,36.65 42.2,36.2 42.2,35.7 C68.1@42,35.5 42,35.521 41.708,35.813 41.387,35.813 41.2,36 41.2,37.8 41,38 40,38 v1(39.2,37.2) 39.2,41.504 39.317,41.621 C78.1@40.111,41.621 40.117,41.615 41.799,41.615 C67.1@41.805,41.609 41.826,41.629 43.759,41.629 U14.62@43.78,41.65 ; FB4.1@46.6,61.45 46.7,61.55 v1(46.7,62.5) ; v1(47.8,57.8) C64.1@48.7,57.8 48.675,57.775 48.675,56.045 U14.30@48.65,56.02 ; C69.1@51.134,32.794 51.302,32.962 52.662,32.962 v1(52.7,33) 54.6,31.1 56.5,31.1 56.8,31.4 56.8,32.694 56.675,32.819 56.675,34.755 U14.95@56.65,34.78 ; C69.1@51.142,32.802 51.142,34.772 U14.84@51.15,34.78 ; v1(53.898,57.802) 53.936,57.84 55.09,57.84 55.125,57.875 55.125,56.045 U14.17@55.15,56.02 ; v1(58.098,61.102) 58.099,61.101 R45.1@59,61.1 R45.1@59,61.1 ; U14.108@63.15,34.78 63.52,34.78 63.7,34.6 63.7,34.3 64.1,33.9 C71.1@64.8,33.9 64.8,35.5 63.8,36.5 62.6,36.5 61.8,37.3 61.8,41.4 63,42.6 63.2,42.6 63.25,42.65 U14.121@65.02,42.65 65.049,42.621 67.153,42.621 C72.1@67.19,42.584 v1(67.99,42.584) ; U14.131@65.02,47.65 65.027,47.643 67.182,47.643 C73.1@67.19,47.635 68.065,47.635 v1(68.631,47.069) ; U14.143@65.02,53.65 65.025,53.655 67.184,53.655 C74.1@67.19,53.661 v1(67.99,53.661) ; U14.144@65.02,54.15 65.031,54.15 65.1,54.219 65.1,54.7 65.5,55.1 C75.1@67.2,55.1 v1(68,55.1)
  other v1: 61.5,62.9 62.1,62.9 62.7,62.9
pads on no net: J2.13 J2.14 J2.15 J2.16 J2.17 J2.18 J2.A8 J2.B8 J9.14 J9.22 J11.1 J11.2 J11.8 J11.9 J11.10 SW1.0 SW3.0 U1.2 U1.3 U1.5 U4.4 U12.10 U14.9 U14.73 U15.40 U17.3 U17.7 U19.14 U21.3 U22.4 U24.3

## Polygon pours and split planes (outlines as drawn)
+12VIN on Top Layer "NONET_L-01_P-001" (solid, pour order 28): 22.5,65.5 22.5,77.5 38,77.5 38,70.5 30.5,70.5 29.5,69.5 29.5,65.5 23,65.5
+3.3V_ISO on Top Layer "NONET_L-01_P-001" (solid, pour order 0): 105.2,74.3 108.2,74.3 108.4,74.5 108.4,77 107.8,77.6 103.9,77.6 103.6,77.3 103.6,75.9 103.9,75.6 105,75.6 105.2,75.4
+5VISO on Top Layer "NONET_L-01_P-001" (solid, pour order 2): 92.1,76.55 93.05,76.55 93.5,76.1 93.5,75.3 94.7,74.1 98.318,74.1 98.527,74.308 98.527,75.427 99.2,76.1 99.2,77.1 98.8,77.5 96.6,77.5 95,79.1 92.2,79.1 92.1,79
SGN_GND on Top Layer "NONET_L-01_P-001" (solid, pour order 69): 88.021,61.664 86.764,61.664 86.7,61.6 86.7,60 86.764,59.936 88.021,59.936 88.021,38.3 86.6,38.3 86.6,36.2 88.021,36.2 88.021,3 86.7,3 86.7,0.9 87.885,0.9 88.021,1.036 88.021,0 120,0 120,85 86.619,85 86.619,78.5 88.021,78.5
USB_GND on Top Layer "NONET_L-01_P-001" (solid, remove dead copper, pour order 67): 0,26.4 40.01,26.4 39.985,26.376 39.985,0.002 0.002,0.002 0,0
+VUSB on Top Layer "NONET_L-01_P-001" (solid, pour order 6): 9.1,16.1 12.1,16.1 12.8,16.8 12.8,20 11.5,20 11.2,19.7 11.2,18.9 10.6,18.3 9.1,18.3
+12V_J on Top Layer "NONET_L-01_P-001" (solid, pour order 65): 12,75.5 16,75.5 16,71.127 17.627,69.5 21.5,69.5 21.5,65.5 15,65.5 15,67.187 12.187,70 12,70
GND_IN on Top Layer "NONET_L-01_P-001" (solid, pour order 70): 83.5,61.65 84.95,61.65 85,61.6 85,59.9 83.5,59.9 83.5,38.3 85,38.3 85,36.3 83.5,36.3 83.5,2.9 85,2.9 85,0.9 83.5,0.9 83.5,0 42.434,0 42.434,31.256 0,31.256 0,84.257 cw(c0.707,84.257) 0.207,84.757 0.45,85 83.5,85
VDD on Top Layer "NONET_L-01_P-001" (solid, pour order 60): 60.2,64.7 64.3,64.7 64.3,62.3 60.2,62.3
+3.3VDC on Top Layer "NONET_L-01_P-001" (solid, pour order 39): 61.8,67.8 64.2,67.8 64.2,65.3 61.8,65.3
+3.3VDC on Top Layer "NONET_L-01_P-001" (solid, pour order 34): 76.9,75 76.9,77.7 76.8,77.8 70.1,77.8 69.2,76.9 69.2,69.8 78.5,69.8 78.5,72.2 71.5,72.2 71.2,72.5 71.2,74.6 71.7,75
+5VDC on Top Layer "NONET_L-01_P-001" (solid, pour order 33): 61.2,84.3 73.4,84.3 73.4,80.8 71.4,80.8 71.4,81.7 71.3,81.8 61.2,81.8
+12VDC on Top Layer "NONET_L-01_P-001" (solid, pour order 32): 42.7,81.6 44.6,81.6 45.3,80.9 45.3,78.3 46,77.6 49.3,77.6 49.5,77.4 49.5,76 49.2,75.7 44.8,75.7 42.7,77.8 42.7,79.6
NetC4_2 on Top Layer "NONET_L-01_P-001" (solid, pour order 30): 43.7,74.7 39,74.7 39,79.3 38.4,79.9 35.7,79.9 35.7,84.3 42.3,84.3 42.3,77.4 43.7,76
NetD1_1 on Top Layer "NONET_L-01_P-001" (solid, pour order 29): 39.2,72.7 39.2,67.4 43.8,67.4 43.8,73.4 42.3,73.4 42.3,69.9 41.7,69.9 41.7,72.7
+12V_K on Top Layer "NONET_L-01_P-001" (solid, pour order 27): 17.5,81.5 21,81.5 21,70.5 17.5,70.5
VBUS on Top Layer "NONET_L-01_P-001" (solid, pour order 26): 17.1,3.4 17.1,2 17.5,1.6 22.8,1.6 23.2,2 23.2,3.3 22.9,3.6 17.3,3.6
+3.3VUSB_FILT on Top Layer "NONET_L-01_P-001" (solid, pour order 17): 20,20.323 20,14.3 20.1,14.2 22.1,14.2 23,15.1 23,19.436 22.113,20.323
+5VUSB_FILT on Top Layer "NONET_L-01_P-001" (solid, pour order 24): 13.3,20.4 13.3,17.9 13.5,17.7 14.8,17.7 15.1,18 16.9,18 17.1,18.2 17.1,20.5 17,20.6 13.4,20.6
VBUS on Bottom Layer "NONET_L-01_P-001" (solid, pour order 1): 19.9,12 14.5,17.4 10.2,17.4 7.7,19.9 7.7,22.5 8.2,23 12.1,23 15.2,19.9 20,19.9 23.2,16.7 28,16.7 28.7,17.4 28.7,20.5 32.3,20.5 32.3,5.9 28.3,1.9 20.1,1.9 19.9,2.1
GND_IN on Bottom Layer "NONET_L-01_P-001" (solid, pour order 56): 83.5,85 83.5,0 42.434,0 42.434,31.256 0,31.256 0,84.257 cw(c0.707,84.257) 0.207,84.757 0.45,85
SGN_GND on Bottom Layer "NONET_L-01_P-001" (solid, pour order 35): 86.619,85 86.619,78.5 88.021,78.5 88.021,0 120,0 120,85
USB_GND on Bottom Layer "NONET_L-01_P-001" (solid, pour order 18): 40,26.2 40,0 0.5,0 0.5,26.2
GND_IN on S3 "NONET_L-01_P-001" (solid, pour order 5): 38.1,31.3 38.1,33.3 44.7,33.3 49.7,38.3 59.3,38.3 59.5,38.1 59.5,36.538 59.912,36.126 61.426,36.126 61.7,36.4 61.7,39.2 60.8,40.1 47.9,40.1 43.1,35.3 31.3,35.3 30,34 30,31.3
+3.3VDC on S3 "NONET_L-01_P-001" (solid, pour order 53): 83.5,72.4 83.5,0.306 42.434,0.306 42.434,17.866 42.4,17.9 68.4,17.9 69.1,18.6 69.1,63.5 68.7,63.9 38.3,63.9 38.1,63.7 38.1,31.8 37.6,31.3 0.5,31.3 0.3,31.5 0.3,63.9 13.1,63.9 21.6,72.4
VDD on S3 "NONET_L-01_P-001" (solid, pour order 63): 38.4,63.6 68.6,63.6 68.6,31.4 38.4,31.4
USB_GND on S3 "NONET_L-01_P-001" (solid, remove dead copper, pour order 78): 0,26.4 40.01,26.4 39.985,26.376 39.985,0.002 0.002,0.002 0,0
GND_IN on S3 "NONET_L-01_P-001" (solid, pour order 77): 79.61,85 79.61,78.4 83.5,78.4 83.5,0 42.434,0 42.434,31.256 0,31.256 0,84.257 cw(c0.707,84.257) 0.207,84.757 0.45,85
+3.3V_ISO on S3 "NONET_L-01_P-001" (solid, pour order 76): 88.021,85 88.021,78.5 88.021,0 120,0 120,85
GND_IN on S1 "NONET_L-01_P-001" (solid, pour order 75): 83.5,0 41.422,0 41.422,31.178 41.4,31.2 0.056,31.2 0,31.256 0,66.275 0,84.55 0.45,85 83.501,85 83.5,84.999
USB_GND on S1 "NONET_L-01_P-001" (solid, remove dead copper, pour order 74): 0,26.4 40.01,26.4 39.985,26.376 39.985,0.002 0.002,0.002 0,0
SGN_GND on S1 "NONET_L-01_P-001" (solid, pour order 73): 86.619,85 86.619,78.5 88.021,78.5 88.021,0 120,0 120,85
SGN_GND on S2 "NONET_L-01_P-001" (solid, pour order 8): 89.1,21.278 89.1,18 103.4,18 103.4,21.278
USB_GND on S2 "NONET_L-01_P-001" (solid, remove dead copper, pour order 68): 0,26.4 40.01,26.4 39.985,26.376 39.985,0.002 0.002,0.002 0,0
+VUSB on S2 "NONET_L-01_P-001" (solid, pour order 21): 10.9,17.2 11.4,17.7 14.6,17.7 14.6,13 10.9,13
GND_IN on S2 "NONET_L-01_P-001" (solid, pour order 25): 79.61,85 79.61,78.4 83.5,78.4 83.5,0 42.434,0 42.434,31.256 0,31.256 0,84.257 cw(c0.707,84.257) 0.207,84.757 0.45,85
+5VISO on S2 "NONET_L-01_P-001" (solid, pour order 64): 88.021,85 88.021,78.5 88.021,0 120,0 120,85
+3.3VUSB_FILT on S4 "NONET_L-01_P-001" (solid, pour order 3): 21.5,19.7 21.7,19.9 34.9,19.9 39.6,19.9 39.6,17.6 22.7,17.6 21.6,17.6 21.5,17.7
U9_VCC on S4 "NONET_L-01_P-001" (solid, pour order 45): 87.8,50.1 99.1,50.1 106.7,57.7 106.7,81 107,81.3 110.7,81.3 111.3,80.7 111.3,77.4 110.8,76.9 110.8,53.8 98.4,41.4 98.4,35.7 98.1,35.4 96.4,35.4 95.2,36.6 95.2,38.6 93.8,40 88,40 87.8,40.2
+5VUSB_FILT on S4 "NONET_L-01_P-001" (solid, remove dead copper, pour order 62): 0,26.4 40.01,26.4 39.985,26.376 39.985,0.002 0.002,0.002 0,0
+3.3VUSB_FILT on S4 "NONET_L-01_P-001" (solid, pour order 57): 22.7,17.7 23,18 23,20.6 22.1,21.5 19,21.5 17.6,22.9 0.9,22.9 0.9,20.9 17.1,20.9 20.3,17.7 21.9,17.7
GND_IN on S4 "NONET_L-01_P-001" (solid, pour order 55): 79.61,85 79.61,78.4 83.5,78.4 83.5,0 42.434,0 42.434,31.256 0,31.256 0,84.257 cw(c0.707,84.257) 0.207,84.757 0.45,85
U7_VCC on S4 "NONET_L-01_P-001" (solid, pour order 48): 99.6,3.9 99.6,10 95.2,14.4 87.9,14.4 87.9,11.3 92.2,11.3 93.9,9.6 93.9,4.6 94.9,3.6 99.3,3.6
U13_VCC on S4 "NONET_L-01_P-001" (solid, pour order 47): 87.9,26.9 105.6,26.9 106.3,26.2 106.3,4.1 105.8,3.6 101.1,3.6 100.8,3.9 100.8,20.6 98.5,22.9 87.9,22.9
U10_VCC on S4 "NONET_L-01_P-001" (solid, pour order 46): 96.1,35 110.5,35 111,34.5 111,4 110.6,3.6 107.2,3.6 106.8,4 106.8,30.6 106,31.4 89.4,31.4 87.8,33 87.8,38.3 88.3,38.8 92.3,38.8
U5_VCC on S4 "NONET_L-01_P-001" (solid, pour order 44): 97.8,52.5 88,52.5 87.8,52.7 87.8,59.4 87.9,59.5 95.5,59.5 100.9,64.9 100.9,80.8 101.4,81.3 105.4,81.3 105.8,80.9 105.8,60.5
U6_VCC on S4 "NONET_L-01_P-001" (solid, pour order 42): 93.5,72.4 94.8,73.7 94.8,80.9 95.1,81.2 99.5,81.2 99.8,80.9 99.8,70.7 96.3,67.1 87.9,67.1 87.9,72.1 88.2,72.4

## Other copper
S3:
  pour cut-out: 27.3,11.5 29.8,11.5 29.8,9 27.3,9

## Silkscreen, mask and mechanical layers (free items; w line width, h text height)
Top Overlay:
  lines w0.1: 0,26.4 40.01,26.4 39.985,0.002 ; 0,31.19 41.4,31.19 41.4,0 ; 83.9,0.003 83.9,71.6 ; 87.7,0.045 87.7,71.6
  text "SGN_GND" at 109.3,62.267 h1
  text "I2C_SCL" at 109.4,59.967 h1
  text "I2C_SDA" at 109.5,57.467 h1
  text "VCC" at 111.8,54.9 h1
  text "S_GND" at 111,52.667 h1
  text "CANL" at 112.1,50.9 h1
  text "CANH" at 112.2,45.4 h1
  text "VCC" at 113,42.9 h1
  text "A" at 114.9,38.1 h1
  text "B" at 114.9,35.8 h1
  text "SGN_GND" at 109.2,29.699 h1
  text "RS232-TX" at 108.3,27 h1
  text "RS232-RX" at 108.3,24.46 h1
  text "VCC" at 112.9,22.032 h1
Mechanical 1:
  lines w0.1: 0,84.5 cw(c0.5,84.5) 0.5,85 ; 0,84.5 cw(c0.5,84.5) 0.5,85 ; 0,84.5 0,0.5 ccw(c0.5,0.5) 0.5,0 43.8,0 44.1,0.3 44.4,0.6 55.4,0.6 56,0 119.5,0 ccw(c119.5,0.5) 120,0.5 120,84.5 ; 0.5,85 45.5,85 46.5,84 50.6,84 51.6,85 119.5,85 ; 119.5,85 cw(c119.5,84.5) 120,84.5 ; 119.5,85 cw(c119.5,84.5) 120,84.5